# Altium PCB PowerSupply.PcbDoc (part 1 of 2)
Units mil, origin at the board's own origin, x right, y up, seen from the top; angles counter-clockwise.
Board outline 2820 x 1020 mil, 2 copper layers (Top Layer, Bottom Layer); 30 components, 23 nets, 113 pads, 44 vias.
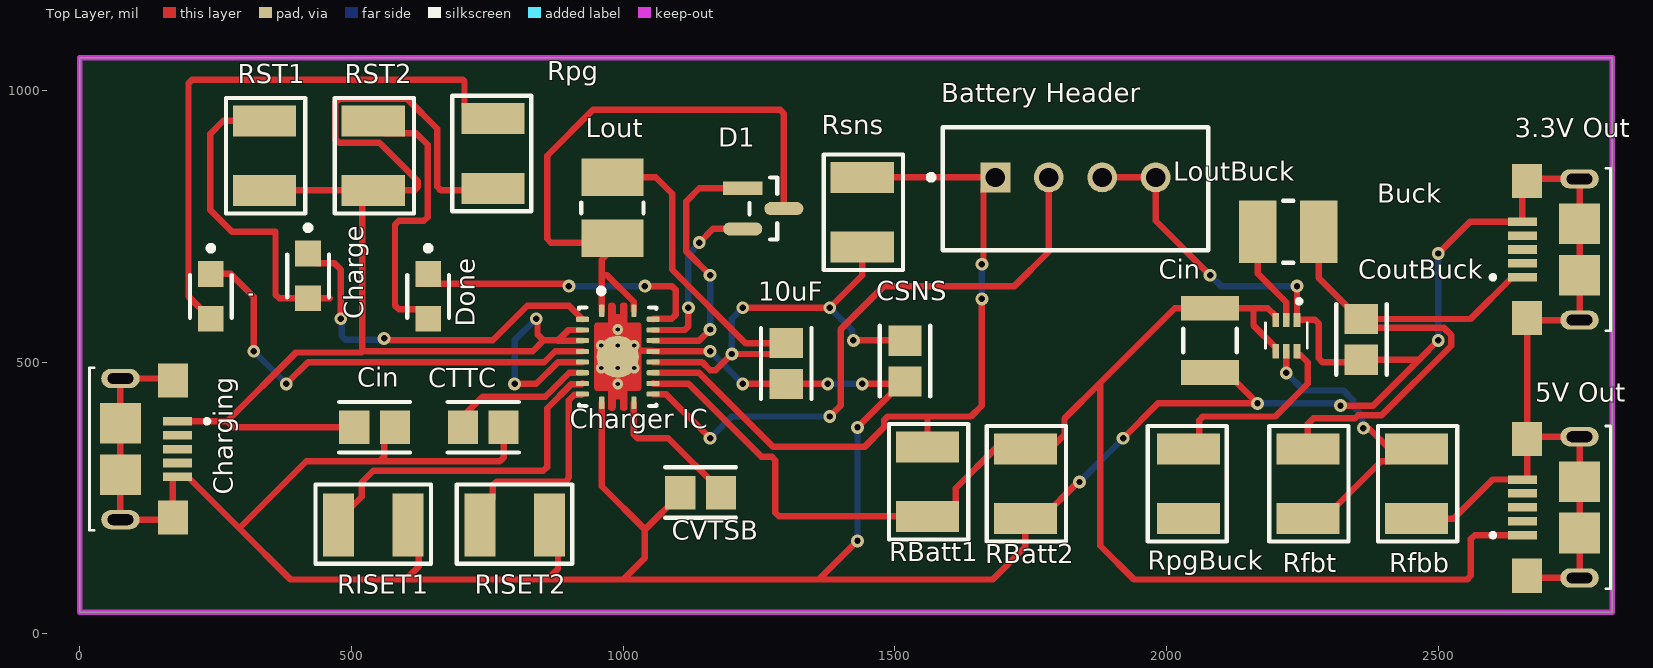
[diagram p0: Top Layer view]
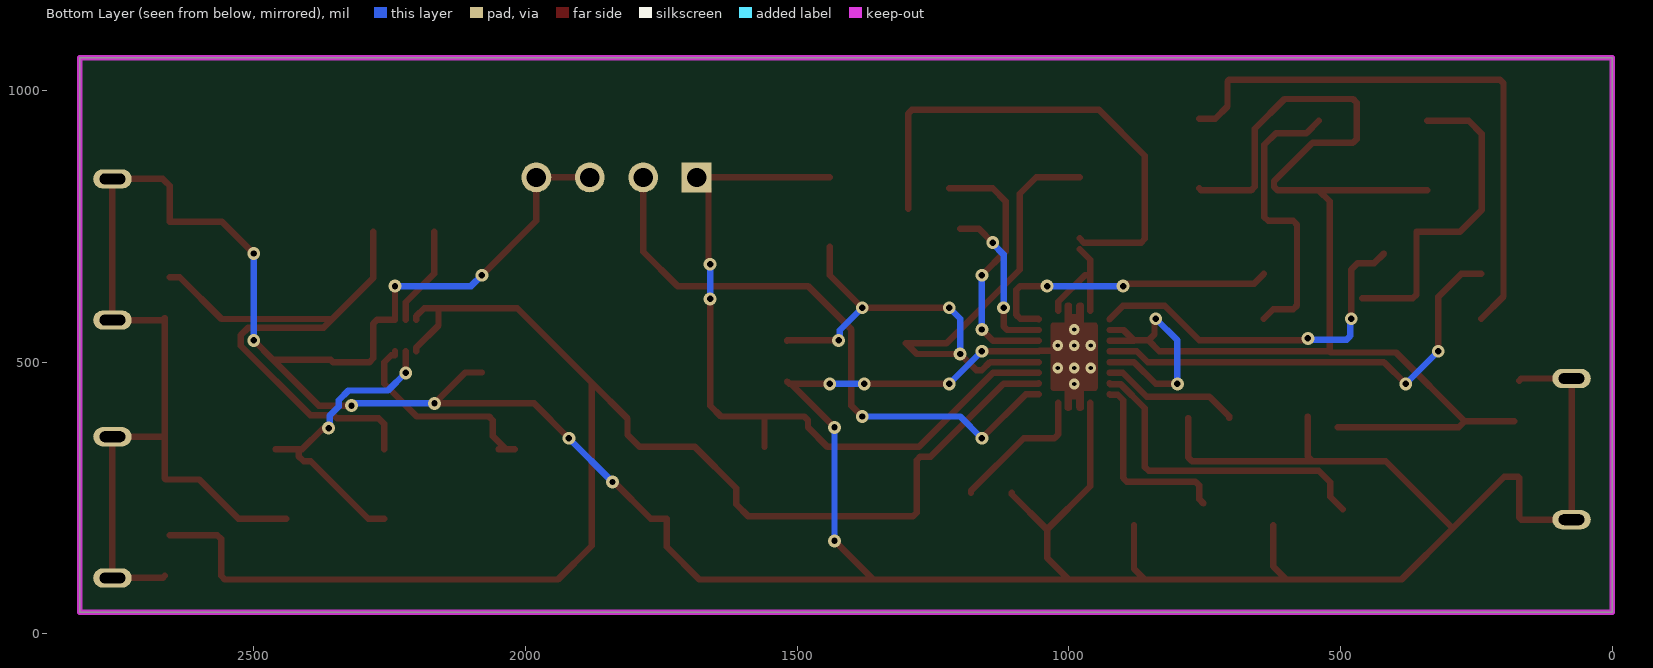
[diagram p1: Bottom Layer view, seen from below]
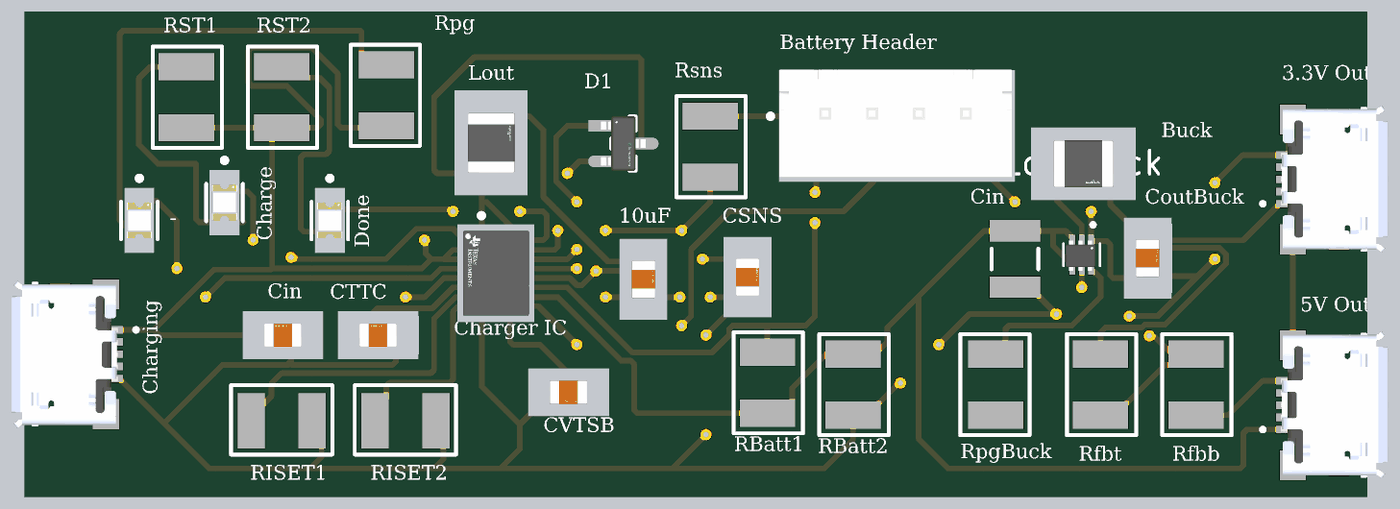
[diagram p2: 3D render of the assembled board from above, using the file's embedded part models]

## Layer stack, top to bottom
Top Solder: solder mask 0.4, Solder Resist, Dk 3.5
Top Layer: signal copper 1.4
Dielectric 1: dielectric 12.6, FR-4, Dk 4.8
Bottom Layer: signal copper 1.4
Bottom Solder: solder mask 0.4, Solder Resist, Dk 3.5

## Board outline
0,40 2820,40 2820,1060 0,1060

## Design rules (kind name [scope] priority, off if disabled: settings)
Clearance [All] p1: gap=5.91 ignorepadtopadclearanceinfootprint=FALSE
MinimumSolderMaskSliver [All] p1: minsoldermaskwidth=4
PolygonConnect [All] p1: connectstyle=Relief reliefconductorwidth=10 reliefentries=4 polygonreliefangle="90 Angle" airgapwidth=10
RoutingVias [All] p1: holewidth=28 width=50 viastyle="Through Hole" minholewidth=28 minwidth=50 maxholewidth=28 maxwidth=50
SilkToSolderMaskClearance [IsText] p1: minsilkscreentomaskgap=6 clearancetoexposedcopper=TRUE
SolderMaskExpansion [All] p1: expansion=1.5 istentingtop=FALSE
Width [All] p1: maxlimit=78.74 minlimit=5.91 preferedwidth=11.81
28 further rules are at their usual default settings.

## Components (designator, comment, footprint, x,y, rotation, side; value= is the part's Value field where it differs from the comment)
"3.3V Out" "10118193-0001LF" USBCHarging 2754.84,707.95 r90 top
"5V Out" "10118193-0001LF" USBCHarging 2754.84,233.46 r90 top
10uF "Cout" CAP2012 1301.46,495.6 r90 top value=10uF
' "Yellow" LED0805 240,620 r270 top
"Battery Header" "B4B-XH-A(LF)(SN)" BATTERYHEADER 1687.48,966.46 r180 top
Buck "TPS62A01ADRL_TRANS" TPS62A01 2217.68,546.85 r270 top
Charge "Red" LED0805 418.86,657.68 r270 top
"Charger IC" "BQ24105RHLR" BQ24105 990,510 r0 top
Charging "10118193-0001LF" USBCHarging 79.84,339.29 r270 top (schematic designator "Micro-USB Charging Port")
Cin "10uF" CAP2012 544.4,381.46 r180 top
Cin "C1210C156Z8VACTU" CAPC1210(3225)170_N 2080,540 r90 top value=15uF
CoutBuck "TMK212BBJ106MGHT" CAP2012 2360,540 r90 top value=10uF
CSNS "" CAP2012 1520,500 r90 top value=100nF
CTTC "0.1uF" CAP2012 744.4,381.46 r180 top value=100nF
CVTSB "0.1uF" CAP2012 1140.62,258.54 r0 top value=100nF
D1 "Zener Diode" ZenerDiode 1257.8,782.6 r0 top
Done "Green" LED0805 640,620 r270 top
Lout "10uH" LBATT 978.78,783.84 r90 top
LoutBuck "DFE322520FD-1R0M=P2" LBUCK 2222.11,741.85 r0 top
RBatt1 "" R3225#1 1560,280 r90 top value=121kR
RBatt2 "CRCW1210100KFKEAHP" R3225#1 1740,276.02 r90 top value=100kR
Rfbb "CRCW1210100KFKEAHP" R3225#1 2460,276.02 r90 top value=100kR
Rfbt "ERJ-P14F4533U" R3225#1 2260,276.02 r90 top value=453kR
RISET1 "7.5kOhm" R3225#1 540,200 r180 top value=7.5kR
RISET2 "7.5kOhm" R3225#1 800,200 r180 top value=7.5kR
Rpg "" R3225#1 760,883.98 r270 top value=1.5kR
RpgBuck "" R3225#2 2040,276.02 r270 top value=499kR
Rsns "0.1Ohm" R3225#1 1440,776.02 r90 top value=100mR
RST1 "" R3225#1 340,880 r90 top value=1.5kR (schematic designator RSTAT1)
RST2 "" R3225#1 540,880 r90 top value=1.5kR (schematic designator RSTAT2)

## Footprints (in the part's own frame and the unit in brackets; to place one, negate y for a bottom-side part, rotate by r counter-clockwise, add the part's x,y. Pads: shape width x height; smd on the part's side, far side on the other; paste and mask are expansions set on the pad)
BATTERYHEADER [mm]
  rect 1.4x1.4 hole 0.9 paste-1000: 1(0.07,3.212)
  round 1.4 hole 0.9 paste-1000: 2(-2.43,3.212) 3(-4.93,3.212) 4(-7.43,3.212)
  silkscreen extent -9.88,0.86 3.19,6.61, body extent -9.9,0.63 2.7,6.58, height 0.25
BQ24105 [mm]
  rrect42% 0.24x0.6 smd paste+0 mask+0: 1(-0.75,2.15) 10(-0.75,-2.15) 11(0.75,-2.15) 20(0.75,2.15)
  rrect42% 0.6x0.24 smd paste+0 mask+0: 2(-1.65,1.75) 3(-1.65,1.25) 4(-1.65,0.75) 5(-1.65,0.25) 6(-1.65,-0.25) 7(-1.65,-0.75) 8(-1.65,-1.25) 9(-1.65,-1.75) 12(1.65,-1.75) 13(1.65,-1.25) 14(1.65,-0.75) 15(1.65,-0.25) 16(1.65,0.25) 17(1.65,0.75) 18(1.65,1.25) 19(1.65,1.75)
  round 1.971 smd paste-1000 mask-1000: 21(0,0)
  Top Layer region: -1.095,1.455 -1.076,1.525 -1.025,1.576 -0.955,1.595 -0.955,1.595 -0.445,1.595 -0.445,2.38 -0.426,2.45 -0.375,2.501 -0.305,2.52 -0.305,2.52 -0.245,2.52 -0.191,2.509 -0.146,2.479 -0.116,2.434 -0.105,2.38 -0.105,2.38 -0.105,1.995 0.105,1.995 0.105,2.38 0.124,2.45 0.175,2.501 0.245,2.52 0.245,2.52 0.305,2.52 0.375,2.501 0.426,2.45 0.445,2.38 0.445,2.38 0.445,1.595 0.955,1.595 1.025,1.576 1.076,1.525 1.095,1.455 1.095,1.455 1.095,-1.455 1.076,-1.525 1.025,-1.576 0.955,-1.595 0.955,-1.595 0.445,-1.595 0.445,-2.38 0.426,-2.45 0.375,-2.501 0.305,-2.52 0.305,-2.52 0.245,-2.52 0.175,-2.501 0.124,-2.45 0.105,-2.38 0.105,-2.38 0.105,-1.995 -0.105,-1.995 -0.105,-2.38 -0.124,-2.45 -0.175,-2.501 -0.245,-2.52 -0.245,-2.52 -0.305,-2.52 -0.375,-2.501 -0.426,-2.45 -0.445,-2.38 -0.445,-2.38 -0.445,-1.595 -0.955,-1.595 -1.025,-1.576 -1.076,-1.525 -1.095,-1.455 -1.095,-1.455
  silkscreen extent -1.8,-2.3 1.8,3.2, body extent -2.05,-2.62 2.05,2.62, height 0.25
CAP2012 [mil]
  rect 55.42x61.5 smd paste+0 mask+0: 1(-35.6,1.46) 2(39.38,1.46)
  silkscreen extent -63,-45 67,48, body extent -83,-49 87,52, height 10
CAPC1210(3225)170_N [mm] "Chip Capacitor, Body 3.2x2.5mm, Height 1.7mm, IPC Medium Density"
  rect 1.15x2.7 smd: 1(-1.5,0) 2(1.5,0)
  silkscreen extent -0.55,-1.25 0.55,1.25, body extent -1.7,-1.35 1.7,1.35, height 1.7
LBATT [mil]
  rect 69.03x114.34 smd paste+0 mask+0: 1(-56.08,-1.22) 2(56.16,-1.22)
  silkscreen extent -10,-58 10,56, body extent -110,-78 110,76, height 10
LBUCK [mil]
  rect 69.03x114.34 smd paste+0 mask+0: 1(-54.35,-1.85) 2(57.89,-1.85)
  silkscreen extent -8,-59 12,55, body extent -109,-79 112,75, height 10
LED0805 [mm]
  rect 1.2x1.2 smd paste+0 mask+0: 1(-1.075,0.029) 2(1.025,0.029)
  silkscreen extent -2.4,-0.95 0.97,1, body extent -1.78,-0.77 1.72,0.83, height 0.25
R3225#1 [mm]
  rect 1.45x2.95 smd: 1(-1.625,0) 2(1.625,0)
  silkscreen extent -2.7,-1.9 2.7,1.8, body extent -1.6,-1.25 1.6,1.25, height 0.55
R3225#2 [mm]
  rect 1.45x2.95 smd: 1(-1.625,0) " "(1.625,0)
  silkscreen extent -2.7,-1.9 2.7,1.8, body extent -1.6,-1.25 1.6,1.25, height 0.55
TPS62A01 [mm]
  rect 0.66x0.31 smd: 1(-0.788,0.567) 2(-0.788,0.067) 3(-0.788,-0.433) 4(0.682,-0.433) 5(0.682,0.067) 6(0.682,0.567)
  silkscreen extent -1.75,-0.91 0.55,1.04, body extent -0.8,-0.8 0.8,0.8, height 0.61
USBCHarging [mm]
  rect 0.4x1.35 smd: 1(-1.318,2.544) 2(-0.668,2.544) 3(-0.018,2.544) 4(0.632,2.544) 5(1.282,2.544)
  rect 1.6x1.4 smd: S1(-3.218,2.319) S2(3.182,2.319)
  rect 1.9x1.9 smd: S3(1.182,-0.131) S4(-1.218,-0.131)
  oval 0.9x1.8 hole 0.5 slot 1.2 at 90 deg: S5(-3.318,-0.131) S6(3.282,-0.131)
  silkscreen extent -3.82,-1.58 3.78,4.02, body extent -3.93,-2.76 3.93,2.95, height 2.81
ZenerDiode [mm]
  rect 1.824x0.618 smd paste+0 mask+0: 1(-0.96,0.95)
  rrect100% 1.824x0.618 smd paste+0 mask+0: 2(-0.96,-0.95) 3(0.96,0)
  silkscreen extent -0.65,-1.45 0.65,1.45, body extent -2.37,-1.95 2.37,1.95, height 0.25

## Part data
"3.3V Out" "5V Out" Charging: "FCI Right Angle Surface Mount Mount Female USB Connector; 100 V ac; 1.8A", Color=Black, Current Rating=1.8A, Flammability Rating="UL94 V-0", Insulation Resistance=1GR, Manufacturer="Amphenol ICC / FCI", Max Operating Temperature=85°C, Max Voltage Rating (AC)=100V, Min Operating Temperature=-55°C, Package Quantity=1200, Supplier Part Number=70236827, Category="USB Connectors", ComponentLink1Description=http://uk.rs-online.com/webdocs/1450/0900766b814507f1.pdf?src-supplier=Rs, ComponentLink1URL=http://uk.rs-online.com/webdocs/1450/0900766b814507f1.pdf?src-supplier=Rs, ComponentLink2Description=https://cdn.amphenol-icc.com/media/wysiwyg/files/documentation/datasheet/inputoutput/io_usb_micro.pdf?src-supplier=Rs, ComponentLink2URL=https://cdn.amphenol-icc.com/media/wysiwyg/files/documentation/datasheet/inputoutput/io_usb_micro.pdf?src-supplier=Rs, ComponentLink3Description=https://cdn.amphenol-icc.com/media/wysiwyg/files/documentation/datasheet/inputoutput/io_usb_micro.pdf?src-supplier=Onlinecomponents.com, ComponentLink3URL=https://cdn.amphenol-icc.com/media/wysiwyg/files/documentation/datasheet/inputoutput/io_usb_micro.pdf?src-supplier=Onlinecomponents.com, ComponentLink4Description=https://cdn.amphenol-icc.com/media/wysiwyg/files/documentation/datasheet/inputoutput/io_usb_micro.pdf?src-supplier=Arrow+Electronics, ComponentLink4URL=https://cdn.amphenol-icc.com/media/wysiwyg/files/documentation/datasheet/inputoutput/io_usb_micro.pdf?src-supplier=Arrow+Electronics, ComponentLink5Description=https://cdn.amphenol-icc.com/media/wysiwyg/files/documentation/datasheet/inputoutput/io_usb_micro.pdf?src-supplier=Allied+Electronics, ComponentLink5URL=https://cdn.amphenol-icc.com/media/wysiwyg/files/documentation/datasheet/inputoutput/io_usb_micro.pdf?src-supplier=Allied+Electronics, ComponentLink6Description=https://cdn.amphenol-icc.com/media/wysiwyg/files/documentation/datasheet/inputoutput/io_usb_micro.pdf?src-supplier=Verical, ComponentLink6URL=https://cdn.amphenol-icc.com/media/wysiwyg/files/documentation/datasheet/inputoutput/io_usb_micro.pdf?src-supplier=Verical, ComponentLink7Description=https://cdn.amphenol-icc.com/media/wysiwyg/files/documentation/datasheet/inputoutput/io_usb_micro.pdf?src-supplier=Avnet, ComponentLink7URL=https://cdn.amphenol-icc.com/media/wysiwyg/files/documentation/datasheet/inputoutput/io_usb_micro.pdf?src-supplier=Avnet, ComponentLink8Description=https://cdn.amphenol-icc.com/media/wysiwyg/files/documentation/datasheet/inputoutput/io_usb_micro.pdf?src-supplier=Mouser, ComponentLink8URL=https://cdn.amphenol-icc.com/media/wysiwyg/files/documentation/datasheet/inputoutput/io_usb_micro.pdf?src-supplier=Mouser, ComponentLink9Description=http://www.amphenol-icc.com/media/wysiwyg/files/drawing/10118193.pdf?src-supplier=Digi-Key, ComponentLink9URL=http://www.amphenol-icc.com/media/wysiwyg/files/drawing/10118193.pdf?src-supplier=Digi-Key, ComponentLink10Description=https://cdn.amphenol-icc.com/media/wysiwyg/files/documentation/datasheet/inputoutput/io_usb_micro.pdf?src-supplier=Digi-Key, ComponentLink10URL=https://cdn.amphenol-icc.com/media/wysiwyg/files/documentation/datasheet/inputoutput/io_usb_micro.pdf?src-supplier=Digi-Key, ComponentLink11Description=https://cdn.amphenol-icc.com/media/wysiwyg/files/documentation/datasheet/inputoutput/io_usb_micro.pdf?src-supplier=Heilind+Electronics, ComponentLink11URL=https://cdn.amphenol-icc.com/media/wysiwyg/files/documentation/datasheet/inputoutput/io_usb_micro.pdf?src-supplier=Heilind+Electronics, ComponentLink12Description=https://cdn.amphenol-icc.com/media/wysiwyg/files/documentation/datasheet/inputoutput/io_usb_micro.pdf?src-supplier=TTI, ComponentLink12URL=https://cdn.amphenol-icc.com/media/wysiwyg/files/documentation/datasheet/inputoutput/io_usb_micro.pdf?src-supplier=TTI, ComponentLink13Description=https://cdn.amphenol-icc.com/media/wysiwyg/files/documentation/datasheet/inputoutput/io_usb_micro.pdf?src-supplier=TME, ComponentLink13URL=https://cdn.amphenol-icc.com/media/wysiwyg/files/documentation/datasheet/inputoutput/io_usb_micro.pdf?src-supplier=TME, Connector Type=USB,Receptacle, Contact Material="Copper Alloy", Contact Plating=Gold, Depth=5.67mm, Features=Shielded, Gender=Female, Housing Material=Polymer, Length=7.86mm, Manufacturer Part Number=10118193-0001LF, Mounting Technology="Surface Mount,Horizontal", Number of Contacts=5, Number of Ports=1, Orientation="Right Angle", Packaging="Tape and Reel", Pins=5, Pitch=0.65mm, Radiation Hardening=No, RoHS=No, Series=-, Supplier="Allied Electronics", Termination=Solder, Voltage Rating=100V
10uF Cin: library part TMK212BBJ106MGHT, "Cap Ceramic 10uF 25V X5R 20% Pad SMD 0805 85C Low ESR Automotive T/R", Case/Package=0805, Manufacturer="Taiyo Yuden", Max Operating Temperature=85°C, Min Operating Temperature=-55°C, Ratings=AEC-Q200, Supplier Part Number=16AC1902, Tolerance=20%, Voltage Rating=25V, Category="Ceramic Capacitors", ComponentLink1Description=http://www.farnell.com/datasheets/2842303.pdf?src-supplier=Farnell, ComponentLink1URL=http://www.farnell.com/datasheets/2842303.pdf?src-supplier=Farnell, ComponentLink2Description=http://ds.yuden.co.jp/TYCOMPAS/ut/detail.do?productNo=TMK212BBJ106MGHT&fileName=TMK212BBJ106MGHT_SS&mode=specSheetDownload&src-supplier=Digi-Key, ComponentLink2URL=http://ds.yuden.co.jp/TYCOMPAS/ut/detail.do?productNo=TMK212BBJ106MGHT&fileName=TMK212BBJ106MGHT_SS&mode=specSheetDownload&src-supplier=Digi-Key, ComponentLink3Description=http://www.farnell.com/datasheets/2842303.pdf?src-supplier=Newark, ComponentLink3URL=http://www.farnell.com/datasheets/2842303.pdf?src-supplier=Newark, Manufacturer Part Number=TMK212BBJ106MGHT, Mounting Technology="Surface Mount", Packaging="Tape and Reel", Pricing="1=0.31000, 25=0.16600, 50=0.13900, 100=0.11200, 250=0.09800 (USD)", RoHS=Yes, RoHS Compliant=Yes, Series=M, Stock=444, Supplier=Newark
': library part LYR976-PS-36, "LED Uni-Color Yellow 591nm 2-Pin SMT T/R", Case Code (Imperial)=0805, Case Code (Metric)=2012, Forward Current=25mA, Forward Voltage=2.5V, Lens Color=White, Manufacturer="Osram Opto", Max Operating Temperature=85°C, Min Operating Temperature=-30°C, Package Quantity=16000, Power Dissipation=65mW, Reverse Voltage=12V, Supplier Part Number=720-LYR976-PS-36, Test Current=20mA, Case/Package=0805, Category=LEDs, Color=Yellow, ComponentLink1Description=https://datasheet.ciiva.com/26883/getdatasheetpartid-623478-26883141.pdf?src-supplier=Verical, ComponentLink1URL=https://datasheet.ciiva.com/26883/getdatasheetpartid-623478-26883141.pdf?src-supplier=Verical, ComponentLink2Description=https://datasheet.ciiva.com/26937/getdatasheetpartid-569561-26937231.pdf?src-supplier=Verical, ComponentLink2URL=https://datasheet.ciiva.com/26937/getdatasheetpartid-569561-26937231.pdf?src-supplier=Verical, Depth=1.35mm, Dominant Wavelength=588nm, Illumination Color=Yellow, Length=2.1mm, Lens Size=1.25mm, Lens Style=Flat,Diffused,Colorless,Rectangular, Lens Transparency=Diffused, Luminous Flux=0.735lm, Luminous Intensity=280mcd, Manufacturer Part Number=LYR976-PS-36, Mounting Technology="Surface Mount", Number of Elements=1, Number of LEDs=1, Packaging="Tape and Reel", Pins=2, Pricing="1=0.30000, 10=0.16500, 50=0.16500, 100=0.07700, 500=0.07100, 1000=0.05500, 5000=0.04700, 10000=0.04300, 16000=0.03700 (USD)", Radiation Hardening=No, RoHS=Yes, RoHS Compliant=Yes, Series="CHIPLED 0805", Stock=181357, Supplier=Mouser, Viewing Angle=160°, Width=1.25mm
"Battery Header": "XH Series 4 Position 2.5 mm Pitch Through Hole Crimp Top Entry Shrouded Header", Color=Natural, Contact Resistance=20mR, Current Rating=3A, Flammability Rating="UL94 V-0", Housing Color=White, Insulation Resistance=1GR, Manufacturer=JST, Max Operating Temperature=85°C, Max Voltage Rating (AC)=250V, Min Operating Temperature=-25°C, Supplier Part Number=8134090, Category="Headers and Wire Housings", ComponentLink1Description=https://datasheet.ciiva.com/16203/b4b-xh-alfsn-16203642.pdf?src-supplier=Future+Electronics, ComponentLink1URL=https://datasheet.ciiva.com/16203/b4b-xh-alfsn-16203642.pdf?src-supplier=Future+Electronics, ComponentLink2Description=https://datasheet.ciiva.com/26894/getdatasheetpartid-455616-26894787.pdf?src-supplier=Verical, ComponentLink2URL=https://datasheet.ciiva.com/26894/getdatasheetpartid-455616-26894787.pdf?src-supplier=Verical, ComponentLink3Description=https://datasheet.ciiva.com/26924/getdatasheetpartid-640571-26924035.pdf?src-supplier=Verical, ComponentLink3URL=https://datasheet.ciiva.com/26924/getdatasheetpartid-640571-26924035.pdf?src-supplier=Verical, ComponentLink4Description=https://datasheet.ciiva.com/726/exh-726404.pdf?src-supplier=Digi-Key, ComponentLink4URL=https://datasheet.ciiva.com/726/exh-726404.pdf?src-supplier=Digi-Key, Connector Type=Header, Contact Finish - Mating=TIN, Contact Material=Brass, Contact Plating=Tin,Lead,Copper, Contact Shape=Square, Contact Type="Male Pin", Depth=5.75mm, Fastening Type=Detent, Gender=Male, Housing Material=Polyamide, Insulation Color=Natural, Insulation Material=Nylon, Lead Free="Lead Free", Lead Pitch=2.5mm, Length=12.4mm, Manufacturer Part Number=B4B-XH-A(LF)(SN), Mated Stacking Heights=9.8mm, Material=Polyamide, Max Current Rating=3A, Max Voltage Rating (DC)=250V, Mounting Technology="Through Hole", Number of Contacts=4, Number of Positions=4, Number of Rows=1, Orientation=Straight, Packaging=Bulk, Pitch=2.5mm, Pricing="1=0.09880, 400=0.09510, 1500=0.09040, 4000=0.08710, 15000=0.07980 (USD)", Reach SVHC Compliant=No, RoHS=Yes, Series=XH, Stock=310237, Supplier="Future Electronics", Termination=Solder, Voltage Rating=250V, Voltage Rating (AC)=250V, Wire/Cable Gauge=22AWG
Buck: DevicesInPackage=1, Manufacturer="Texas Instruments", PackageName=TPS62A01ADRL, PSpiceTemplate="X^@REFDES %EN %FB %GND %PG %SW %VIN @MODEL PARAMS: ?SS|SS=@SS||SS=0|", < Value >=TPS62A01ADRL_TRANS, DeviceDesignator=A, DeviceNumbering=Alpha, DevicesInView=1, IsHeterogeneous=False, OriginalSymbolOrigin=(20000,20000), PartNumber=TPS62A01ADRL, PCB Footprint=DRL0006A-MFG, TPS62A01=0
Charge: library part LSR976-NR-1, "Led SMT Red 0805 Tape", Case Code (Imperial)=0805, Case Code (Metric)=2012, Forward Current=25mA, Forward Voltage=2.5V, Lens Color=White, Manufacturer="Osram Opto", Max Operating Temperature=85°C, Min Operating Temperature=-30°C, Package Quantity=16000, Power Dissipation=65mW, Reverse Voltage=12V, Supplier Part Number=Q62702P5178, Test Current=20mA, Case/Package=0805, Category=LEDs, Color=Red, ComponentLink1Description=https://datasheet.ciiva.com/4688/o-ls-ly-r976-24152-4688435.pdf?src-supplier=Mouser, ComponentLink1URL=https://datasheet.ciiva.com/4688/o-ls-ly-r976-24152-4688435.pdf?src-supplier=Mouser, ComponentLink2Description=https://datasheet.ciiva.com/26920/getdatasheetpartid-568367-26920831.pdf?src-supplier=Verical, ComponentLink2URL=https://datasheet.ciiva.com/26920/getdatasheetpartid-568367-26920831.pdf?src-supplier=Verical, ComponentLink3Description=https://datasheet.ciiva.com/2112/00078896-0-2112782.pdf?src-supplier=Digi-Key, ComponentLink3URL=https://datasheet.ciiva.com/2112/00078896-0-2112782.pdf?src-supplier=Digi-Key, ComponentLink4Description=https://datasheet.ciiva.com/2112/00078896-0-2112781.pdf?src-supplier=Digi-Key, ComponentLink4URL=https://datasheet.ciiva.com/2112/00078896-0-2112781.pdf?src-supplier=Digi-Key, ComponentLink5Description=https://datasheet.ciiva.com/2112/00078896-0-2112783.pdf?src-supplier=Digi-Key, ComponentLink5URL=https://datasheet.ciiva.com/2112/00078896-0-2112783.pdf?src-supplier=Digi-Key, Depth=1.35mm, Dominant Wavelength=633nm, Height=0.9mm, Illumination Color=Red, Length=2.1mm, Lens Size=1.25mm, Lens Style=Flat,Diffused,Colorless,Rectangular, Lens Transparency=Diffused, Luminous Flux=0.47lm, Luminous Intensity=180mcd, Manufacturer Part Number=LSR976-NR-1, Mounting Technology="Surface Mount", Number of Elements=1, Number of LEDs=1, Packaging="Tape and Reel", Pins=2, Pricing="4000=0.03250, 8000=0.03167, 16000=0.03084, 24000=0.03002, 32000=0.02919, 40000=0.02836, 400000=0.02753 (USD)", Radiation Hardening=No, RoHS=Yes, RoHS Compliant=Yes, Series="CHIPLED 0805", Stock=76000, Supplier=Avnet, Viewing Angle=160°, Width=1.25mm
"Charger IC": "Charger IC Multi-Chemistry 20-VQFN (3.5x4.5)", Battery Pack Voltage=15.5V, Case/Package="VQFN EP", Manufacturer="Texas Instruments", Max Charge Current=2A, Max Operating Temperature=85°C, Max Output Voltage=8.4V, Max Supply Voltage=16V, Min Input Voltage=4.3V, Min Operating Temperature=-40°C, Min Supply Voltage=4.35V, Package Quantity=1, Supplier Part Number=595-BQ24105RHLR, Switching Frequency=1.1MHz, Category="Battery Management", ComponentLink1Description=https://datasheet.ciiva.com/22697/1822372-22697057.pdf?src-supplier=Element14, ComponentLink1URL=https://datasheet.ciiva.com/22697/1822372-22697057.pdf?src-supplier=Element14, ComponentLink2Description=https://datasheet.ciiva.com/1144/75479-1144736.pdf?src-supplier=Newark, ComponentLink2URL=https://datasheet.ciiva.com/1144/75479-1144736.pdf?src-supplier=Newark, ComponentLink3Description=https://datasheet.ciiva.com/15114/getdatasheetpartid-188126-15114478.pdf?src-supplier=Verical, ComponentLink3URL=https://datasheet.ciiva.com/15114/getdatasheetpartid-188126-15114478.pdf?src-supplier=Verical, ComponentLink4Description=https://datasheet.ciiva.com/1932/bq24100-1932834.pdf?src-supplier=Digi-Key, ComponentLink4URL=https://datasheet.ciiva.com/1932/bq24100-1932834.pdf?src-supplier=Digi-Key, ComponentLink5Description=https://datasheet.ciiva.com/1932/bq24100-1932833.pdf?src-supplier=Digi-Key, ComponentLink5URL=https://datasheet.ciiva.com/1932/bq24100-1932833.pdf?src-supplier=Digi-Key, ComponentLink6Description=https://datasheet.ciiva.com/1932/bq24100-1932835.pdf?src-supplier=Digi-Key, ComponentLink6URL=https://datasheet.ciiva.com/1932/bq24100-1932835.pdf?src-supplier=Digi-Key, ComponentLink7Description=https://datasheet.ciiva.com/4873/slus606o-82020-4873468.pdf?src-supplier=Mouser, ComponentLink7URL=https://datasheet.ciiva.com/4873/slus606o-82020-4873468.pdf?src-supplier=Mouser, ComponentLink8Description=https://datasheet.ciiva.com/1136/1831046-1136641.pdf?src-supplier=Element14, ComponentLink8URL=https://datasheet.ciiva.com/1136/1831046-1136641.pdf?src-supplier=Element14, ComponentLink9Description=https://datasheet.ciiva.com/3213/bq24115-3213497.pdf?src-supplier=Avnet, ComponentLink9URL=https://datasheet.ciiva.com/3213/bq24115-3213497.pdf?src-supplier=Avnet, Contact Plating=Gold, Fault Protection="Over Voltage,Over Temperature", Height=0.9mm, Lead Free="Lead Free", Length=4.5mm, Manufacturer Part Number=BQ24105RHLR, Max Output current=2A, Number of Cells=123, Output Current=2A, Output Voltage=15.5V, Packaging="Tape and Reel", Pins=20, Pricing="1=7.70000, 10=6.95000, 50=6.63000, 100=5.75000, 1000=4.57000, 10000=4.42000 (USD)", Radiation Hardening=No, Reach SVHC Compliant=No, RoHS=Yes, RoHS Compliant=Yes, Series=bqSWITCHER™, Stock=3270, Supplier=Mouser, Weight=0.001668oz, Width=3.5mm
Cin: "Capacitor; Ceramic; Cap; 15uF; Tol+80%; -20%; SMT; Vol-Rtg 10V; High Cap.; Y5V", Case Code=1210, Case Code (Metric)=3225, Dielectric=Y5V, Manufacturer=KEMET, Max Operating Temperature=85°C, Min Operating Temperature=-30°C, Package Quantity=1, Tolerance=80%, Voltage Rating=10V, Case Code (Imperial)=1210, Case/Package=1210, Category="Ceramic Capacitors", ComponentLink1Description=https://datasheet.ciiva.com/14599/70095383-14599054.pdf?src-supplier=Allied+Electronics, ComponentLink1URL=https://datasheet.ciiva.com/14599/70095383-14599054.pdf?src-supplier=Allied+Electronics, Depth=2.5mm, Dissipation Factor=10%, Height=1.55mm, Lead Free="Lead Free", Length=3.2mm, Manufacturer Part Number=C1210C156Z8VACTU, Mounting Technology="Surface Mount,PCB", Packaging="Tape and Reel", Pricing="1=0.44940, 10=0.43580, 25=0.43520, 100=0.41460, 250=0.41380, 500=0.38950, 1000=0.38420 (USD)", RoHS=Yes, RoHS Compliant=Yes, Series=C1210C, Stock=1032, Supplier="Arrow Electronics", Supplier Part Number=C1210C156Z8VACTU, Termination=SMD/SMT, Thickness=0.067inch, Voltage Rating (DC)=10V, Width=0.098inch
CoutBuck: "Cap Ceramic 10uF 25V X5R 20% Pad SMD 0805 85C Low ESR Automotive T/R", Case/Package=0805, Manufacturer="Taiyo Yuden", Max Operating Temperature=85°C, Min Operating Temperature=-55°C, Ratings=AEC-Q200, Supplier Part Number=16AC1902, Tolerance=20%, Voltage Rating=25V, Category="Ceramic Capacitors", ComponentLink1Description=http://www.farnell.com/datasheets/2842303.pdf?src-supplier=Farnell, ComponentLink1URL=http://www.farnell.com/datasheets/2842303.pdf?src-supplier=Farnell, ComponentLink2Description=http://ds.yuden.co.jp/TYCOMPAS/ut/detail.do?productNo=TMK212BBJ106MGHT&fileName=TMK212BBJ106MGHT_SS&mode=specSheetDownload&src-supplier=Digi-Key, ComponentLink2URL=http://ds.yuden.co.jp/TYCOMPAS/ut/detail.do?productNo=TMK212BBJ106MGHT&fileName=TMK212BBJ106MGHT_SS&mode=specSheetDownload&src-supplier=Digi-Key, ComponentLink3Description=http://www.farnell.com/datasheets/2842303.pdf?src-supplier=Newark, ComponentLink3URL=http://www.farnell.com/datasheets/2842303.pdf?src-supplier=Newark, Manufacturer Part Number=TMK212BBJ106MGHT, Mounting Technology="Surface Mount", Packaging="Tape and Reel", Pricing="1=0.31000, 25=0.16600, 50=0.13900, 100=0.11200, 250=0.09800 (USD)", RoHS=Yes, RoHS Compliant=Yes, Series=M, Stock=444, Supplier=Newark
CSNS CTTC CVTSB: library part C0805C104K4RACTU, "Cap Ceramic 0.1uF 16V X7R 10% SMD 0805 125°C T/R", Case Code (Imperial)=0805, Case Code (Metric)=2012, Dielectric=X7R, Dielectric Material=Ceramic, Manufacturer=KEMET, Max Operating Temperature=125°C, Min Operating Temperature=-55°C, Package Quantity=4000, Supplier Part Number=05AC8015, Tolerance=10%, Voltage=16V, Case/Package=0805, Category="Ceramic Capacitors", ComponentLink1Description=https://datasheet.ciiva.com/46443/1851736-46443710.pdf?src-supplier=Element14, ComponentLink1URL=https://datasheet.ciiva.com/46443/1851736-46443710.pdf?src-supplier=Element14, ComponentLink2Description=https://datasheet.ciiva.com/46443/1851736-46443711.pdf?src-supplier=Element14, ComponentLink2URL=https://datasheet.ciiva.com/46443/1851736-46443711.pdf?src-supplier=Element14, Construction=Flat, Contact Plating=Tin,Matte, Depth=1.25mm, Height=0.9mm, Lead Pitch=0.75mm, Length=2mm, Manufacturer Part Number=C0805C104K4RACTU, Mounting Technology="Surface Mount,PCB", Packaging="Tape and Reel", Pins=2, Pricing="1=0.04200, 4000=0.04200, 10000=0.03700, 20000=0.02900, 40000=0.02200 (USD)", Radiation Hardening=No, Reach SVHC Compliant=No, RoHS=Yes, RoHS Compliant=Yes, Series="SMD Comm X7R", Stock=28000, Supplier=Newark, Termination=SMD/SMT, Voltage Rating=16V, Voltage Rating (DC)=16V
D1: library part MMBZ18VALT1G, "ESD Suppressor Diode Zener Uni-Dir/Bi-Dir 14.5V 3-Pin SOT-23 T/R", Breakdown Voltage=17.1V, Case/Package=SOT-23-3, Clamping Voltage=25V, Leakage Current=50nA, Manufacturer="ON Semiconductor", Max Breakdown Voltage=18.9V, Max Operating Temperature=150°C, Max Power Dissipation=225mW, Max Surge Current=1.6A, Min Operating Temperature=-55°C, Operating Supply Voltage=14.5V, Package Quantity=3000, Peak Pulse Power=40W, Power Line Protection=No, Supplier Part Number=7295033, Test Current=1mA, Voltage Rating (DC)=18V, Category="Zener Diodes", Clamping Voltage-Max=25V, ComponentLink1Description=https://datasheet.ciiva.com/15143/getdatasheetpartid-110231-15143507.pdf?src-supplier=Verical, ComponentLink1URL=https://datasheet.ciiva.com/15143/getdatasheetpartid-110231-15143507.pdf?src-supplier=Verical, ComponentLink2Description=https://datasheet.ciiva.com/4507/mmbz5v6alt1-d-4507882.pdf?src-supplier=Mouser, ComponentLink2URL=https://datasheet.ciiva.com/4507/mmbz5v6alt1-d-4507882.pdf?src-supplier=Mouser, ComponentLink3Description=https://datasheet.ciiva.com/3304/mmbz5v6alt1-d-3304031.pdf?src-supplier=Avnet, ComponentLink3URL=https://datasheet.ciiva.com/3304/mmbz5v6alt1-d-3304031.pdf?src-supplier=Avnet, ComponentLink4Description=https://datasheet.ciiva.com/16379/mmbz5v6alt1-d-16379322.pdf?src-supplier=Future+Electronics, ComponentLink4URL=https://datasheet.ciiva.com/16379/mmbz5v6alt1-d-16379322.pdf?src-supplier=Future+Electronics, ComponentLink5Description=https://datasheet.ciiva.com/339/mmbz5v6alt1-d-339743.pdf?src-supplier=Digi-Key, ComponentLink5URL=https://datasheet.ciiva.com/339/mmbz5v6alt1-d-339743.pdf?src-supplier=Digi-Key, ComponentLink6Description=https://datasheet.ciiva.com/339/mmbz5v6alt1-d-339744.pdf?src-supplier=Digi-Key, ComponentLink6URL=https://datasheet.ciiva.com/339/mmbz5v6alt1-d-339744.pdf?src-supplier=Digi-Key, ComponentLink7Description=https://datasheet.ciiva.com/339/mmbz5v6alt1-d-339742.pdf?src-supplier=Digi-Key, ComponentLink7URL=https://datasheet.ciiva.com/339/mmbz5v6alt1-d-339742.pdf?src-supplier=Digi-Key, Depth=1.3mm, Diode Type=ZENER, Direction=Unidirectional, ESD Protection=Yes, Height=1.01mm, Lead Free="Lead Free", Length=2.9mm, Manufacturer Part Number=MMBZ18VALT1G, Max Reverse Leakage Current=50nA, Min Breakdown Voltage=17.1V, Number of Channels=2, Number of Elements=2, Number of Unidirectional Channels=2, Packaging="Tape and Reel", Peak Pulse Current=1.6A, Pins=3, Polarity=Unidirectional, Power Dissipation=40W, Pricing="3000=0.02150, 12000=0.02060, 45000=0.01970, 75000=0.01940, 150000=0.01850 (USD)", Radiation Hardening=No, Reach SVHC Compliant=No, Reverse Breakdown Voltage=17.1V, Reverse Standoff Voltage=14.5V, RoHS=Yes, RoHS Compliant=Yes, Series=-, Stock=144000, Supplier="Future Electronics", Termination=SMD/SMT, Width=1.4mm, Working Voltage=14.5V
Done: library part LGR971-KN-1, "LED Uni-Color Green 572nm 2-Pin Chip 0805(2012Metric) T/R", Case/Package=SMD/SMT, Forward Current=25mA, Forward Voltage=2.5V, Manufacturer="Osram Opto", Max Operating Temperature=85°C, Min Operating Temperature=-30°C, Package Quantity=16000, Power Dissipation=65mW, Reverse Voltage=12V, Supplier Part Number=1152237, Test Current=20mA, Category=Uncategorized, Color=Green, ComponentLink1Description=https://datasheet.ciiva.com/4688/g-r971-221296-4688589.pdf?src-supplier=Mouser, ComponentLink1URL=https://datasheet.ciiva.com/4688/g-r971-221296-4688589.pdf?src-supplier=Mouser, ComponentLink2Description=https://datasheet.ciiva.com/15198/getdatasheetpartid-233880-15198360.pdf?src-supplier=Verical, ComponentLink2URL=https://datasheet.ciiva.com/15198/getdatasheetpartid-233880-15198360.pdf?src-supplier=Verical, ComponentLink3Description=https://datasheet.ciiva.com/15198/getdatasheetpartid-462214-15198395.pdf?src-supplier=Verical, ComponentLink3URL=https://datasheet.ciiva.com/15198/getdatasheetpartid-462214-15198395.pdf?src-supplier=Verical, ComponentLink4Description=https://datasheet.ciiva.com/14918/00078860-0-14918605.pdf?src-supplier=Digi-Key, ComponentLink4URL=https://datasheet.ciiva.com/14918/00078860-0-14918605.pdf?src-supplier=Digi-Key, ComponentLink5Description=https://datasheet.ciiva.com/14918/00078860-0-14918604.pdf?src-supplier=Digi-Key, ComponentLink5URL=https://datasheet.ciiva.com/14918/00078860-0-14918604.pdf?src-supplier=Digi-Key, ComponentLink6Description=https://datasheet.ciiva.com/14918/00078860-0-14918606.pdf?src-supplier=Digi-Key, ComponentLink6URL=https://datasheet.ciiva.com/14918/00078860-0-14918606.pdf?src-supplier=Digi-Key, Depth=1.35mm, Dominant Wavelength=570nm, Height=0.8mm, Length=2.1mm, Lens Style=Diffused,Colorless,Rectangular, Luminous Flux=0.1lm, Luminous Intensity=45mcd, Manufacturer Part Number=LGR971-KN-1, Mounting Technology="Surface Mount", Number of Elements=1, Number of LEDs=1, Packaging="Tape and Reel", Pins=2, Pricing="16000=0.03030, 32000=0.02960, 48000=0.02920, 64000=0.02890, 80000=0.02800 (USD)", Radiation Hardening=No, RoHS=Yes, RoHS Compliant=Yes, Series=CHipLED, Stock=112000, Supplier="Future Electronics", Viewing Angle=160°, Width=1.25mm
Lout: library part TFM322512ALMA100MTAA, "Inductor Power Shielded Thin Film 10uH 20% 1MHz Metal 1.2A 0.36Ohm DCR 1210 Automotive T/R", Case/Package=1210, DC Resistance (DCR)=360mR, Manufacturer=TDK, Max Operating Temperature=150°C, Min Operating Temperature=-55°C, Ratings=AEC-Q200, Saturation Current=1.6A, Test Frequency=1MHz, Tolerance=20%, Category="Fixed Inductors", Core Material=Metal, Manufacturer Part Number=TFM322512ALMA100MTAA, Mounting Technology="Surface Mount", Pricing="2000=0.36750, 4000=0.35360, 6000=0.35010, 10000=0.34660 (USD)", RoHS=Yes, RoHS Compliant=Yes, Series=TFM-ALMA, Shielding=Shielded, Stock=10000, Supplier="Arrow Electronics", Supplier Part Number=TFM322512ALMA100MTAA
LoutBuck: "Inductor Power Shielded Wirewound 1uH 20% 1MHz Metal 4.1A 0.022Ohm DCR 1210 Automotive T/R", Manufacturer=Murata, Manufacturer Part Number=DFE322520FD-1R0M=P2, Category="Fixed Inductors", Pricing="1=0.83780, 10=0.65160 (USD)", RoHS=Yes, Stock=14, Supplier="Arrow Electronics", Supplier Part Number=DFE322520FD-1R0M=P2
RBatt1: library part CRCW1210121KFKEA, "Res Thick Film 1210 121K Ohm 1% 1/2W ±100ppm/°C Molded SMD SMD Paper T/R", Case Code (Imperial)=1210, Case Code (Metric)=3225, Manufacturer="Vishay Dale", Max Operating Temperature=155°C, Max Power Dissipation=500mW, Min Operating Temperature=-55°C, Package Quantity=5000, Supplier Part Number=71-CRCW1210-121K-E3, Temperature Coefficient=100ppm/°C, Tolerance=1%, Voltage Rating=200V, Case/Package=1210, Category="Chip SMD Resistors", ComponentLink1Description=https://datasheet.ciiva.com/5548/dcrcwe3-109170-5548951.pdf?src-supplier=Mouser, ComponentLink1URL=https://datasheet.ciiva.com/5548/dcrcwe3-109170-5548951.pdf?src-supplier=Mouser, ComponentLink2Description=https://datasheet.ciiva.com/8975/dcrcwe3-8975144.pdf?src-supplier=Avnet, ComponentLink2URL=https://datasheet.ciiva.com/8975/dcrcwe3-8975144.pdf?src-supplier=Avnet, ComponentLink3Description=https://datasheet.ciiva.com/16391/dcrcwe3-16391478.pdf?src-supplier=Future+Electronics, ComponentLink3URL=https://datasheet.ciiva.com/16391/dcrcwe3-16391478.pdf?src-supplier=Future+Electronics, Contact Plating=Tin, Features="Automotive AEC-Q200", Height=0.55mm, Lead Free="Lead Free", Length=3.2mm, Manufacturer Part Number=CRCW1210121KFKEA, Number of Terminations=2, Packaging="Tape and Reel", Power Rating=500mW, Pricing="1=0.25000, 10=0.21500, 50=0.21500, 100=0.09000, 1000=0.04100, 10000=0.03400 (USD)", Radiation Hardening=No, RoHS=Yes, RoHS Compliant=Yes, Series=CRCW, Stock=10271, Supplier=Mouser, Voltage Rating (DC)=200V, Weight=0.000564oz, Width=2.5mm
RBatt2 Rfbb: "Res Thick Film 1210 100K Ohm 1% 0.75W(3/4W) ±100ppm/C Pad SMD Automotive T/R", Case Code (Imperial)=1210, Case Code (Metric)=3225, Manufacturer="Vishay Dale", Max Operating Temperature=155°C, Max Power Dissipation=750mW, Min Operating Temperature=-55°C, Package Quantity=5000, Supplier Part Number=71-CRCW1210100KFKEAH, Temperature Coefficient=100ppm/°C, Tolerance=1%, Voltage Rating=200V, Case/Package=1210, Category="Chip SMD Resistors", ComponentLink1Description=https://datasheet.ciiva.com/5549/crcwhpe3-46056-5549052.pdf?src-supplier=Mouser, ComponentLink1URL=https://datasheet.ciiva.com/5549/crcwhpe3-46056-5549052.pdf?src-supplier=Mouser, Features="Automotive AEC-Q200", Height=0.6mm, Lead Free="Lead Free", Length=3.2mm, Manufacturer Part Number=CRCW1210100KFKEAHP, Number of Terminations=2, Packaging="Tape and Reel", Power Rating=750mW, Pricing="1=0.66000, 10=0.48900, 50=0.48900, 100=0.25500, 1000=0.16000, 2500=0.15500, 5000=0.15100, 10000=0.15100 (USD)", RoHS=Yes, RoHS Compliant=Yes, Series=CRCW-HP, Stock=14700, Supplier=Mouser, Termination=SMD/SMT, Weight=0.000564oz, Width=2.5mm
Rfbt: "Res Thick Film 1210 453K Ohm 1% 1/2W ±100ppm/°C Molded SMD SMD Embossed Carrier T/R", Case Code (Imperial)=1210, Case Code (Metric)=3225, Manufacturer=Panasonic, Max Operating Temperature=155°C, Max Power Dissipation=500mW, Min Operating Temperature=-55°C, Package Quantity=5000, Ratings=AEC-Q200, Resistance Tolerance=1%, Resistor Type="Thick Film", Supplier Part Number=667-ERJ-P14F4533U, Temperature Coefficient=100ppm/°C, Voltage Rating=200V, Case/Package=1210, Category="Chip SMD Resistors", ComponentLink1Description=https://datasheet.ciiva.com/22721/1801181-22721902.pdf?src-supplier=Farnell, ComponentLink1URL=https://datasheet.ciiva.com/22721/1801181-22721902.pdf?src-supplier=Farnell, ComponentLink2Description=https://datasheet.ciiva.com/22668/1801181-22668505.pdf?src-supplier=Element14, ComponentLink2URL=https://datasheet.ciiva.com/22668/1801181-22668505.pdf?src-supplier=Element14, ComponentLink3Description=https://datasheet.ciiva.com/46382/1801181-46382281.pdf?src-supplier=Element14, ComponentLink3URL=https://datasheet.ciiva.com/46382/1801181-46382281.pdf?src-supplier=Element14, ComponentLink4Description=https://datasheet.ciiva.com/24070/aoa0000ce4-64075-24070265.pdf?src-supplier=Mouser, ComponentLink4URL=https://datasheet.ciiva.com/24070/aoa0000ce4-64075-24070265.pdf?src-supplier=Mouser, Contact Plating=Tin, Features="Automotive AEC-Q200", Height=0.6mm, Length=3.2mm, Manufacturer Part Number=ERJ-P14F4533U, Mounting Technology="Surface Mount", Number of Terminations=2, Packaging="Tape and Reel", Power Rating=500mW, Pricing="1=0.54000, 10=0.38700, 50=0.38700, 100=0.15400, 1000=0.07100, 10000=0.05600 (USD)", Reach SVHC Compliant=No, RoHS=Yes, RoHS Compliant=Yes, Series=ERJ, Stock=4871, Supplier=Mouser, Termination=SMD/SMT, Tolerance=1%, Voltage Rating (DC)=200V, Width=2.5mm
RISET1 RISET2: library part ERJP14F7501U, "Res Thick Film 1210 7.5K Ohm 1% 1/2W ±100ppm/°C Molded SMD Embossed Carrier T/R", Case Code (Imperial)=1210, Case Code (Metric)=3225, Manufacturer=Panasonic, Max Operating Temperature=155°C, Min Operating Temperature=-55°C, Package Quantity=5000, Power Rating=500mW, Resistance Tolerance=1%, Resistor Type="Thick Film", Supplier Part Number=667-ERJ-P14F7501U, Temperature Coefficient=100ppm/°C, Voltage Rating=200V, Case/Package=1210, Category="Chip SMD Resistors", ComponentLink1Description=https://datasheet.ciiva.com/11817/0900766b812cb812-11817425.pdf?src-supplier=Rs, ComponentLink1URL=https://datasheet.ciiva.com/11817/0900766b812cb812-11817425.pdf?src-supplier=Rs, ComponentLink2Description=https://datasheet.ciiva.com/7836/1790600-7836703.pdf?src-supplier=Element14, ComponentLink2URL=https://datasheet.ciiva.com/7836/1790600-7836703.pdf?src-supplier=Element14, ComponentLink3Description=https://datasheet.ciiva.com/5868/aoa0000ce4-5868361.pdf?src-supplier=Farnell, ComponentLink3URL=https://datasheet.ciiva.com/5868/aoa0000ce4-5868361.pdf?src-supplier=Farnell, ComponentLink4Description=https://datasheet.ciiva.com/22699/1801181-22699306.pdf?src-supplier=Element14, ComponentLink4URL=https://datasheet.ciiva.com/22699/1801181-22699306.pdf?src-supplier=Element14, ComponentLink5Description=https://datasheet.ciiva.com/24192/aoa0000ce4-64075-24192329.pdf?src-supplier=Mouser, ComponentLink5URL=https://datasheet.ciiva.com/24192/aoa0000ce4-64075-24192329.pdf?src-supplier=Mouser, ComponentLink6Description=https://datasheet.ciiva.com/9194/aoa0000ce4-9194893.pdf?src-supplier=Avnet, ComponentLink6URL=https://datasheet.ciiva.com/9194/aoa0000ce4-9194893.pdf?src-supplier=Avnet, Contact Plating=Tin, Depth=2.5mm, Height=0.6mm, Length=3.2mm, Manufacturer Part Number=ERJP14F7501U, Mounting Technology="Surface Mount", Packaging="Tape and Reel", Pins=2, Pricing="1=0.54000, 10=0.38700, 50=0.38700, 100=0.15500, 1000=0.08700, 10000=0.05600 (USD)", Reach SVHC Compliant=No, RoHS=Yes, RoHS Compliant=Yes, Series=ERJ-P14, Stock=3156, Supplier=Mouser, Technology="THICK FILM", Termination=SMD/SMT, Tolerance=1%, Voltage Rating (DC)=200V, Weight=0.000564oz, Width=2.5mm
Rpg RST1 RST2: library part ERJ-S14J152U, "Res Thick Film 1210 1.5K Ohm 5% 1/2W ±200ppm/°C Molded SMD SMD Embossed Carrier T/R", Case Code (Imperial)=1210, Case Code (Metric)=3225, Current Rating=2A, Manufacturer=Panasonic, Max Operating Temperature=155°C, Max Power Dissipation=500mW, Min Operating Temperature=-55°C, Package Quantity=5000, Supplier Part Number=667-ERJ-S14J152U, Temperature Coefficient=200ppm/°C, Tolerance=5%, Voltage Rating=200V, Voltage Rating (DC)=400V, Case/Package=1210, Category="Chip SMD Resistors", ComponentLink1Description=https://datasheet.ciiva.com/9198/aoa0000ce5-9198330.pdf?src-supplier=Avnet, ComponentLink1URL=https://datasheet.ciiva.com/9198/aoa0000ce5-9198330.pdf?src-supplier=Avnet, Contact Plating=Tin, Features=Anti-Sulfur, Height=0.028inch, Lead Free="Lead Free", Length=0.126inch, Manufacturer Part Number=ERJ-S14J152U, Mounting Technology="Surface Mount", Number of Terminations=2, Packaging="Tape and Reel", Power Rating=500mW, Pricing="1=0.51000, 10=0.36600, 50=0.36600, 100=0.14600, 1000=0.07200, 10000=0.05700 (USD)", RoHS=Yes, RoHS Compliant=Yes, Series=ERJ, Stock=72, Supplier=Mouser, Termination=SMD/SMT, Width=2.5mm
RpgBuck: library part ERJP14F4993U, "Res Thick Film 1210 499K Ohm 1% 0.5W ±100ppm/°C Molded SMD Embossed Carrier T/R", Case Code (Imperial)=1210, Case Code (Metric)=3225, Manufacturer=Panasonic, Max Operating Temperature=155°C, Min Operating Temperature=-55°C, Package Quantity=5000, Power Rating=500mW, Resistance Tolerance=1%, Resistor Type="Thick Film", Supplier Part Number=667-ERJ-P14F4993U, Temperature Coefficient=100ppm/°C, Voltage Rating=200V, Case/Package=1210, Category="Chip SMD Resistors", ComponentLink1Description=https://datasheet.ciiva.com/22721/1801181-22721215.pdf?src-supplier=Farnell, ComponentLink1URL=https://datasheet.ciiva.com/22721/1801181-22721215.pdf?src-supplier=Farnell, ComponentLink2Description=https://datasheet.ciiva.com/22672/1801181-22672950.pdf?src-supplier=Element14, ComponentLink2URL=https://datasheet.ciiva.com/22672/1801181-22672950.pdf?src-supplier=Element14, ComponentLink3Description=https://datasheet.ciiva.com/46382/1801181-46382826.pdf?src-supplier=Element14, ComponentLink3URL=https://datasheet.ciiva.com/46382/1801181-46382826.pdf?src-supplier=Element14, ComponentLink4Description=https://datasheet.ciiva.com/24208/aoa0000ce4-64075-24208767.pdf?src-supplier=Mouser, ComponentLink4URL=https://datasheet.ciiva.com/24208/aoa0000ce4-64075-24208767.pdf?src-supplier=Mouser, ComponentLink5Description=https://datasheet.ciiva.com/9181/aoa0000ce4-9181562.pdf?src-supplier=Avnet, ComponentLink5URL=https://datasheet.ciiva.com/9181/aoa0000ce4-9181562.pdf?src-supplier=Avnet, Contact Plating=Tin, Height=0.6mm, Length=3.2mm, Manufacturer Part Number=ERJP14F4993U, Mounting Technology="Surface Mount", Packaging="Tape and Reel", Pricing="1=0.50000, 10=0.35900, 50=0.35900, 100=0.14400, 1000=0.07100, 10000=0.05900 (USD)", Reach SVHC Compliant=No, RoHS=Yes, RoHS Compliant=Yes, Series=ERJ-P14, Stock=4678, Supplier=Mouser, Termination=SMD/SMT, Tolerance=1%, Voltage Rating (DC)=200V, Weight=0.000564oz, Width=2.5mm
Rsns: library part ERJ14RSFR10U, "Res Thick Film 1210 0.1 Ohm 1% 1/4W ±200ppm/°C Molded SMD Embossed Carrier T/R", Case Code (Imperial)=1210, Case Code (Metric)=3225, Manufacturer=Panasonic, Max Operating Temperature=125°C, Min Operating Temperature=-55°C, Package Quantity=5000, Power Rating=250mW, Resistance Tolerance=1%, Resistor Type="Thick Film", Supplier Part Number=63W0528, Temperature Coefficient=200ppm/°C, Voltage Rating=200V, Case/Package=1210, Category="Chip SMD Resistors", ComponentLink1Description=https://datasheet.ciiva.com/11818/0900766b80eefa12-11818672.pdf?src-supplier=Rs, ComponentLink1URL=https://datasheet.ciiva.com/11818/0900766b80eefa12-11818672.pdf?src-supplier=Rs, ComponentLink2Description=https://datasheet.ciiva.com/6137/391509-6137455.pdf?src-supplier=Farnell, ComponentLink2URL=https://datasheet.ciiva.com/6137/391509-6137455.pdf?src-supplier=Farnell, ComponentLink3Description=https://datasheet.ciiva.com/7944/391509-7944584.pdf?src-supplier=Element14, ComponentLink3URL=https://datasheet.ciiva.com/7944/391509-7944584.pdf?src-supplier=Element14, ComponentLink4Description=https://datasheet.ciiva.com/6137/391509-6137436.pdf?src-supplier=Farnell, ComponentLink4URL=https://datasheet.ciiva.com/6137/391509-6137436.pdf?src-supplier=Farnell, ComponentLink5Description=https://datasheet.ciiva.com/7944/391509-7944583.pdf?src-supplier=Element14, ComponentLink5URL=https://datasheet.ciiva.com/7944/391509-7944583.pdf?src-supplier=Element14, ComponentLink6Description=https://datasheet.ciiva.com/24056/aoa0000ce3-72189-24056939.pdf?src-supplier=Mouser, ComponentLink6URL=https://datasheet.ciiva.com/24056/aoa0000ce3-72189-24056939.pdf?src-supplier=Mouser, ComponentLink7Description=https://datasheet.ciiva.com/9186/aoa0000ce3-9186712.pdf?src-supplier=Avnet, ComponentLink7URL=https://datasheet.ciiva.com/9186/aoa0000ce3-9186712.pdf?src-supplier=Avnet, Contact Plating=Tin, Depth=2.5mm, Height=0.6mm, Length=3.2mm, Manufacturer Part Number=ERJ14RSFR10U, Mounting Technology="Surface Mount", Packaging="Tape and Reel", Pins=2, Pricing="1=1.00000, 10=0.37200, 25=0.34300, 50=0.31500, 100=0.28600, 250=0.27800 (USD)", Reach SVHC Compliant=No, RoHS=Yes, RoHS Compliant=Yes, Series=ERJ, Stock=365, Supplier=Newark, Technology="THICK FILM", Termination=SMD/SMT, Tolerance=1%, Width=2.5mm

## Via types
v1: diameter 23.62, hole 11.81, Top Layer to Bottom Layer, 36 vias
v2: diameter 19.68, hole 7.87, Top Layer to Bottom Layer, 8 vias

## Nets (pads, with @x,y where several pads share a name; then routed paths per layer and width w, separated by ;. In a path a pad name is that pad's centre, name@x,y a point inside that pad or via, vN(x,y) a via of type N, cw(c..) or ccw(c..) an arc to the next point about the centre after c; other vN are vias at no path point)
CE: 10uF.1 "3.3V Out.5" "3.3V Out.S1" "3.3V Out.S2" "3.3V Out.S3" "3.3V Out.S4" "3.3V Out.S5" "3.3V Out.S6" "5V Out.5" "5V Out.S1" "5V Out.S2" "5V Out.S3" "5V Out.S4" "5V Out.S5" "5V Out.S6" "Battery Header.3" "Battery Header.4" "Charger IC.10" "Charger IC.16" "Charger IC.21" Buck.1 Charging.5 Charging.S1 Charging.S2 Charging.S3 Charging.S4 Charging.S5 Charging.S6 Cin.1 CoutBuck.1 CSNS.1 CTTC.1 CVTSB.1 RBatt2.1 Rfbb.1 RISET1.1 RISET2.1 | length 8317.4
  Top Layer w11.81: Charging.S1 167.2,469.92 Charging.S5 Charging.S4 Charging.S3 Charging.S6 167.2,210.08 Charging.S2 171.14,286.85 173.11,288.82 Charging.5 198.7,288.82 293.11,194.41 ; 555.4,317.72 416.42,317.72 293.11,194.41 ; 555.4,322.32 560,326.92 Cin.1@560,400 ; 560,317.72 773.08,317.72 780,324.64 CTTC.1@780,397.21 ; RISET1.1@623.98,200 623.98,123.98 600,100 ; RISET2.1@880,200 880,120 860,100 ; 960.47,425.35 960.47,271.46 1040,191.94 ; v2(1020.51,530.67) 1022.64,530.67 1032.29,521.02 1053.78,521.02 1054.96,519.84 1159.84,519.84 v1(1160,520) ; CVTSB.1 1105.02,256.96 1040,191.94 ; v1(1220,460) 10uF.1 v1(1376.38,460) ; v1(1431.1,171.1) 1360,100 ; v1(1431.1,380) CSNS.1@1511.1,460 ; v1(1440,460) CSNS.1@1511.1,460 ; CSNS.1 1514.14,460 CSNS.1@1511.1,460 ; v1(1839.67,279.41) 1836.89,279.41 1769.53,212.05 RBatt2.1 1740,160 1680,100 1360,100 ; 1881.57,840 1980,840 1980,760 v1(2080,660) ; v1(1920,360) 1984.11,424.11 v1(2167.35,424.11) 2110.51,480.94 Cin.1@2080,480.94 ; v1(2240,640) Buck.1 2273.08,577.87 2280,570.96 2280,506.92 2286.92,500 2354.14,500 CoutBuck.1 2464.4,504.4 ; v1(2320,420) 2380,420 2464.4,504.4 ; Rfbb.1@2440,212.05 2528.13,212.05 2600.02,283.94 2654.69,283.94 2661.57,283.94 2663.54,285.91 2663.54,358.74 ; v1(2500,540) 2464.4,504.4 ; v1(2500,700) 2558.43,758.43 2654.69,758.43 2654.69,824.37 2663.54,833.23 2667.48,837.17 2760,837.17 2760,754.49 2760,660 2760,577.32 2667.48,577.32 2663.54,581.26 2663.54,358.74 ; 2663.54,106.77 2667.48,102.83 2760,102.83 2760,185.51 2760,280 2760,362.68 2667.48,362.68 2663.54,358.74 ; 293.11,194.41 387.52,100 600,100 ; 600,100 860,100 ; 860,100 1000,100 ; 1000,100 1360,100 ; 1000,100 1040,140 1040,191.94
  Bottom Layer w11.81: v1(1160,520) v1(1220,460) ; v1(1376.38,460) v1(1440,460) ; v1(1431.1,171.1) v1(1431.1,380) ; v1(1839.67,279.41) 1839.67,279.54 1920,359.87 v1(1920,360) ; v1(2080,660) 2100,640 v1(2240,640) ; v1(2167.35,424.11) 2312.69,424.11 2316.8,420 v1(2320,420) ; v1(2500,540) v1(2500,700)
  other v2: 990,459.8 959.49,489.33 990,489.33 1020.51,489.33 959.49,530.67 990,530.67 990,560.2
Coutbatt: 10uF.2 "Charger IC.15" CSNS.2 Lout.2 Rsns.1 | length 1364
  Top Layer w11.81: Lout.2 1060,840 1090,810 1090,670 1225.02,534.98 10uF.2 1279.97,514.95 v1(1200,514.95) 1169.95,484.89 1160.16,484.89 1144.9,500.16 1054.96,500.16 ; v1(1220,600) v1(1380,600) 1440,660 Rsns.1 ; v1(1423.62,540) 1517.92,540 CSNS.2
  Bottom Layer w11.81: v1(1200,514.95) 1200,580 v1(1220,600) ; v1(1380,600) 1421.36,558.64 1421.36,542.26 v1(1423.62,540)
Coutbuck: "3.3V Out.1" CoutBuck.2 LoutBuck.2 Rfbt.2 | length 1089.3
  Top Layer w11.81: Rfbt.2 2260,386.26 2270.12,396.38 2346.57,396.38 2352.48,402.28 2395.69,402.28 2523.62,530.22 2523.62,549.78 2509.78,563.62 2371.26,563.62 2280,654.88 LoutBuck.2 ; CoutBuck.2 2559.3,579.38 2635.98,656.06 2654.69,656.06
FB: "5V Out.1" "Charger IC.13" Buck.3 Buck.4 Cin.2@2080,599.06 RBatt1.1 RBatt2.2 | length 2781.3
  Top Layer w11.81: 1054.96,460.79 1055.75,460 1120,460 1253.74,326.26 1273.08,326.26 1280,319.34 1280,222.94 1286.92,216.02 RBatt1.1 1589.53,216.02 1612.17,238.66 1612.17,268.19 1687.95,343.98 1789.53,343.98 1812.17,366.61 1812.17,396.14 1878.01,461.99 ; Buck.4 2200.63,526.89 2160,567.52 2160,599.06 ; Buck.3 2200.63,584.76 2186.34,599.06 2160,599.06 ; 2654.69,181.57 2566.92,181.57 2560,174.66 2560,106.92 2553.08,100 1940,100 1878.01,161.99 1878.01,461.99 ; 1878.01,461.99 2015.08,599.06 2080,599.06 2160,599.06
FBbuck: Buck.5 Rfbb.2 Rfbt.1 | length 574.6
  Top Layer w11.81: v1(2220.31,480.32) Buck.5 ; Rfbt.1 2289.53,212.05 2394.84,317.36 2407.83,317.36 2417.48,327.01 Rfbb.2@2417.48,340 ; v1(2362.26,378.66) 2364.52,376.4 2374.07,376.4 2410.47,340 Rfbb.2@2417.48,340 ; Rfbb.2 2440,340 Rfbb.2@2417.48,340
  Bottom Layer w11.81: v1(2220.31,480.32) 2252.9,447.73 2325.67,447.73 2343.62,429.78 2343.62,418.21 2360,401.83 2360,380.92 v1(2362.26,378.66)
IN: "Charger IC.3" "Charger IC.4" "Charger IC.6" Charging.1 Cin.2@505.02,380 Rpg.2 RST1.1 RST2.1 | length 2699.2
  Top Layer w11.81: Charging.1 271.18,391.18 ; RST1.1 RST2.1 ; Cin.2@505.02,380 282.36,380 271.18,391.18 ; Rpg.2 756.02,816.02 664.64,816.02 657.72,822.94 657.72,929.58 602.96,984.33 477.04,984.33 470.12,977.41 470.12,910.54 477.04,903.62 551.39,903.62 622.28,832.73 622.28,822.94 615.36,816.02 RST2.1 ; v1(800,460) 840,460 880.16,500.16 925.04,500.16 ; v1(840,580) 842.26,577.74 842.26,551.15 853.41,540 ; 925.04,539.53 880.47,539.53 880,540 ; 925.04,559.21 899.21,559.21 880,540 ; 271.18,391.18 397.72,517.72 517.72,517.72 520,520 ; 520,520 833.41,520 853.41,540 ; 520,520 520,796.02 RST2.1 ; 853.41,540 880,540
  Bottom Layer w11.81: v1(800,460) 800,540 v1(840,580)